# EAGLE board growledspanelxprod (EAGLE 8.3.1)
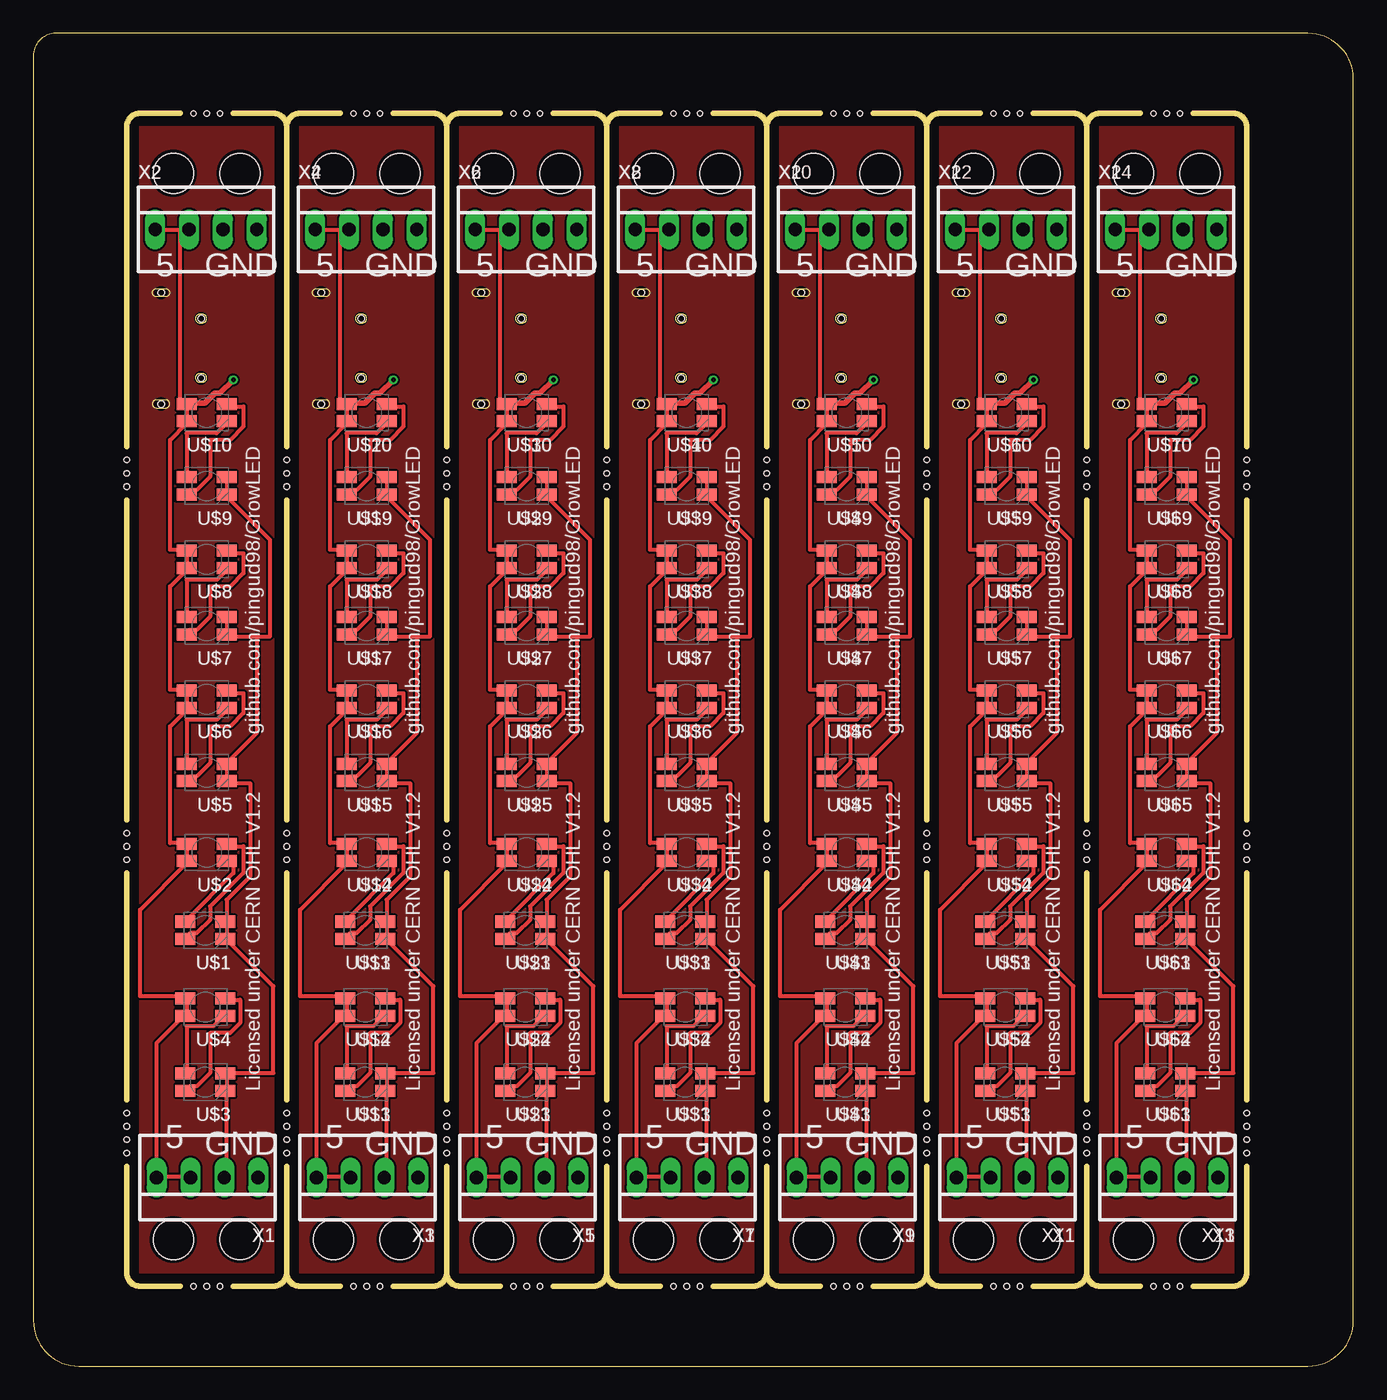
[diagram p0: board, top side]
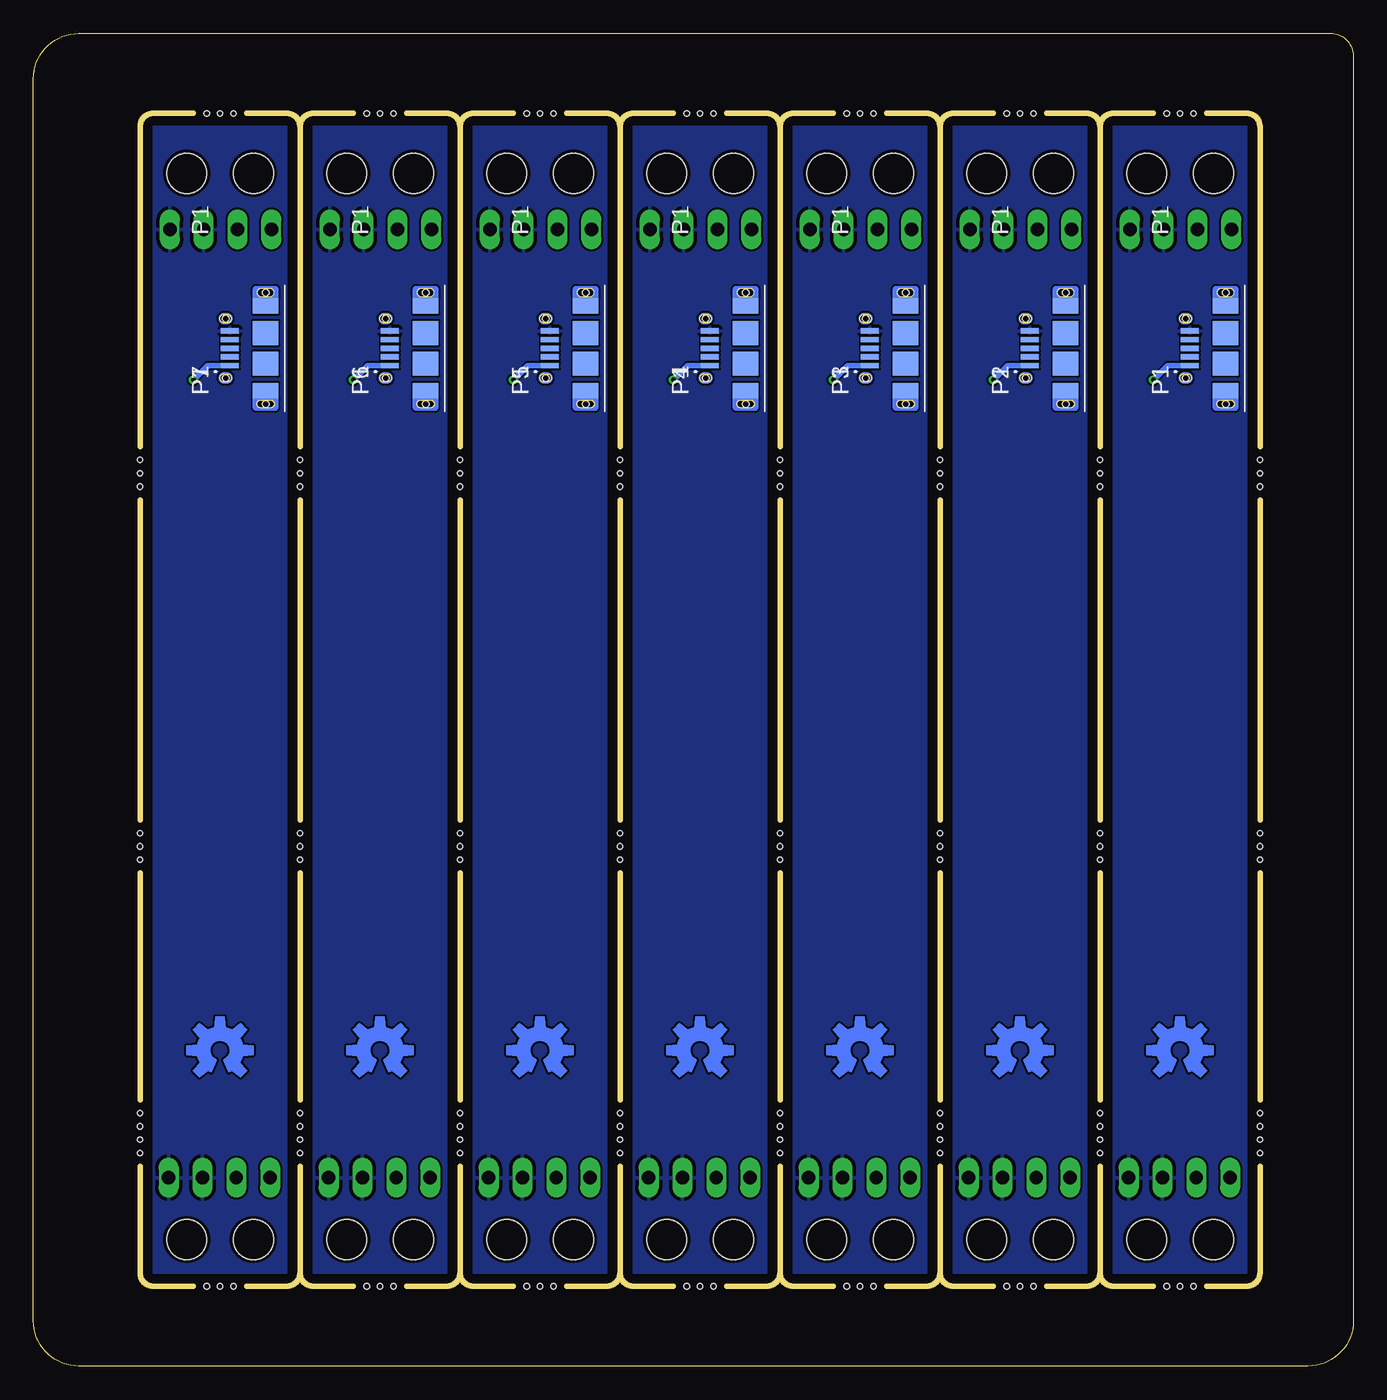
[diagram p1: board, bottom side, seen from below]

Size 99 x 100 mm. Coordinates in mm from the lower left corner, seen from the top.
Outline: 0,98.29 0,3.41 arc90 3.41,0 95.59,0 arc90 99,3.41 99,96.59 arc90 95.59,100 1.71,100 arc90 0,98.29
Copper layers (1*16): Top 0.035mm / dielectric 1.5mm / Bottom 0.035mm
Design rules "dirt_cheap_dirty_boards.v1": minimum track width 5mil, minimum drill 12mil, track to track 5mil, track to pad 5mil, pad to pad 5mil, via to via 5mil, smd to smd 0mil, copper to edge 10mil, drill to drill 10mil, minimum pad ring 10mil, minimum via ring 6mil, stop-mask expansion 2mil, vias tented up to drill 25mil, thermal gap 10mil
Net classes: 0 default: width 0.305 mm, clearance 0.152 mm
Holes 3 mm at 10.5,9.5 15.5,9.5 10.5,89.5 15.5,89.5 22.5,9.5 27.5,9.5 22.5,89.5 27.5,89.5 34.5,9.5 39.5,9.5 34.5,89.5 39.5,89.5 46.5,9.5 51.5,9.5 46.5,89.5 51.5,89.5 58.5,9.5 63.5,9.5 58.5,89.5 63.5,89.5 70.5,9.5 75.5,9.5 70.5,89.5 75.5,89.5 82.5,9.5 87.5,9.5 82.5,89.5 87.5,89.5
Holes 0.4 mm at 7,40 7,39 7,38 7,68 7,67 7,66 12,94 13,94 14,94 19,68 19,67 19,66 19,40 19,39 19,38 19,19 19,18 19,17 19,16 7,19 7,18 7,17 7,16 12,6 13,6 14,6 24,94 25,94 26,94 31,68 31,67 31,66 31,40 31,39 31,38 31,19 31,18 31,17 31,16 24,6 25,6 26,6 36,94 37,94 38,94 43,68 43,67 43,66 43,40 43,39 43,38 43,19 43,18 43,17 43,16 36,6 37,6 38,6 48,94 49,94 50,94 55,68 55,67 55,66 55,40 55,39 55,38 55,19 55,18 55,17 55,16 48,6 49,6 50,6 60,94 61,94 62,94 67,68 67,67 67,66 67,40 67,39 67,38 67,19 67,18 67,17 67,16 60,6 61,6 62,6 72,94 73,94 74,94 79,68 79,67 79,66 79,40 79,39 79,38 79,19 79,18 79,17 79,16 72,6 73,6 74,6 84,94 85,94 86,94 91,68 91,67 91,66 91,40 91,39 91,38 91,19 91,18 91,17 91,16 84,6 85,6 86,6
Milling: 112 lines

## Footprints (pad centres in the part's own frame; a part is rotated, then mirrored left to right if it is on the bottom)
MOLEX_0475890001 = smd 0.4 x 1.35: 1 -1.3,2.675; 2 -0.65,2.675; 3 0,2.675; 4 0.65,2.675; 5 1.3,2.675 | smd 1.175 x 1.9: 6 -3.187,0; 9 3.187,0 | smd 1.8 x 1.9: 7 -1.15,0; 8 1.15,0 | hole 0.5: -2.225,3; 2.225,3; -4.175,0; 4.175,0
4-PLCC = smd 1.5 x 0.9: 1 -1.5,-0.65; 2 1.5,-0.65; 3 -1.5,0.65; 4 1.5,0.65
22-23-2041 = drill 1 long: 1 -3.81,0; 2 -1.27,0; 3 1.27,0; 4 3.81,0

## Placement (x,y rotation side)
LOGO1  OSHW-LOGOM-COPPER  [OSHW-LOGO-M_COPPER]  13,23.7 0 bottom
LOGO2  OSHW-LOGOM-COPPER  [OSHW-LOGO-M_COPPER]  25,23.7 0 bottom
LOGO3  OSHW-LOGOM-COPPER  [OSHW-LOGO-M_COPPER]  37,23.7 0 bottom
LOGO4  OSHW-LOGOM-COPPER  [OSHW-LOGO-M_COPPER]  49,23.7 0 bottom
LOGO5  OSHW-LOGOM-COPPER  [OSHW-LOGO-M_COPPER]  61,23.7 0 bottom
LOGO6  OSHW-LOGOM-COPPER  [OSHW-LOGO-M_COPPER]  73,23.7 0 bottom
LOGO7  OSHW-LOGOM-COPPER  [OSHW-LOGO-M_COPPER]  85,23.7 0 bottom
P1  0475890001  [MOLEX_0475890001]  9.58,76.37 90 bottom
P2  0475890001  [MOLEX_0475890001]  21.58,76.37 90 bottom
P3  0475890001  [MOLEX_0475890001]  33.58,76.37 90 bottom
P4  0475890001  [MOLEX_0475890001]  45.58,76.37 90 bottom
P5  0475890001  [MOLEX_0475890001]  57.58,76.37 90 bottom
P6  0475890001  [MOLEX_0475890001]  69.58,76.37 90 bottom
P7  0475890001  [MOLEX_0475890001]  81.58,76.37 90 bottom
U$1  RBLED  [4-PLCC]  12.9,32.7 180 top
U$2  RBLED  [4-PLCC]  13,38.54 180 top
U$3  RBLED  [4-PLCC]  12.9,21.32 180 top
U$4  RBLED  [4-PLCC]  12.9,26.94 180 top
U$5  RBLED  [4-PLCC]  13,44.54 180 top
U$6  RBLED  [4-PLCC]  13,50.04 180 top
U$7  RBLED  [4-PLCC]  13,55.54 180 top
U$8  RBLED  [4-PLCC]  13,60.54 180 top
U$9  RBLED  [4-PLCC]  13,66.04 180 top
U$10  RBLED  [4-PLCC]  13,71.54 180 top
U$11  RBLED  [4-PLCC]  24.9,21.32 180 top
U$12  RBLED  [4-PLCC]  24.9,26.94 180 top
U$13  RBLED  [4-PLCC]  24.9,32.7 180 top
U$14  RBLED  [4-PLCC]  25,38.54 180 top
U$15  RBLED  [4-PLCC]  25,44.54 180 top
U$16  RBLED  [4-PLCC]  25,50.04 180 top
U$17  RBLED  [4-PLCC]  25,55.54 180 top
U$18  RBLED  [4-PLCC]  25,60.54 180 top
U$19  RBLED  [4-PLCC]  25,66.04 180 top
U$20  RBLED  [4-PLCC]  25,71.54 180 top
U$21  RBLED  [4-PLCC]  36.9,21.32 180 top
U$22  RBLED  [4-PLCC]  36.9,26.94 180 top
U$23  RBLED  [4-PLCC]  36.9,32.7 180 top
U$24  RBLED  [4-PLCC]  37,38.54 180 top
U$25  RBLED  [4-PLCC]  37,44.54 180 top
U$26  RBLED  [4-PLCC]  37,50.04 180 top
U$27  RBLED  [4-PLCC]  37,55.54 180 top
U$28  RBLED  [4-PLCC]  37,60.54 180 top
U$29  RBLED  [4-PLCC]  37,66.04 180 top
U$30  RBLED  [4-PLCC]  37,71.54 180 top
U$31  RBLED  [4-PLCC]  48.9,21.32 180 top
U$32  RBLED  [4-PLCC]  48.9,26.94 180 top
U$33  RBLED  [4-PLCC]  48.9,32.7 180 top
U$34  RBLED  [4-PLCC]  49,38.54 180 top
U$35  RBLED  [4-PLCC]  49,44.54 180 top
U$36  RBLED  [4-PLCC]  49,50.04 180 top
U$37  RBLED  [4-PLCC]  49,55.54 180 top
U$38  RBLED  [4-PLCC]  49,60.54 180 top
U$39  RBLED  [4-PLCC]  49,66.04 180 top
U$40  RBLED  [4-PLCC]  49,71.54 180 top
U$41  RBLED  [4-PLCC]  60.9,21.32 180 top
U$42  RBLED  [4-PLCC]  60.9,26.94 180 top
U$43  RBLED  [4-PLCC]  60.9,32.7 180 top
U$44  RBLED  [4-PLCC]  61,38.54 180 top
U$45  RBLED  [4-PLCC]  61,44.54 180 top
U$46  RBLED  [4-PLCC]  61,50.04 180 top
U$47  RBLED  [4-PLCC]  61,55.54 180 top
U$48  RBLED  [4-PLCC]  61,60.54 180 top
U$49  RBLED  [4-PLCC]  61,66.04 180 top
U$50  RBLED  [4-PLCC]  61,71.54 180 top
U$51  RBLED  [4-PLCC]  72.9,21.32 180 top
U$52  RBLED  [4-PLCC]  72.9,26.94 180 top
U$53  RBLED  [4-PLCC]  72.9,32.7 180 top
U$54  RBLED  [4-PLCC]  73,38.54 180 top
U$55  RBLED  [4-PLCC]  73,44.54 180 top
U$56  RBLED  [4-PLCC]  73,50.04 180 top
U$57  RBLED  [4-PLCC]  73,55.54 180 top
U$58  RBLED  [4-PLCC]  73,60.54 180 top
U$59  RBLED  [4-PLCC]  73,66.04 180 top
U$60  RBLED  [4-PLCC]  73,71.54 180 top
U$61  RBLED  [4-PLCC]  84.9,21.32 180 top
U$62  RBLED  [4-PLCC]  84.9,26.94 180 top
U$63  RBLED  [4-PLCC]  84.9,32.7 180 top
U$64  RBLED  [4-PLCC]  85,38.54 180 top
U$65  RBLED  [4-PLCC]  85,44.54 180 top
U$66  RBLED  [4-PLCC]  85,50.04 180 top
U$67  RBLED  [4-PLCC]  85,55.54 180 top
U$68  RBLED  [4-PLCC]  85,60.54 180 top
U$69  RBLED  [4-PLCC]  85,66.04 180 top
U$70  RBLED  [4-PLCC]  85,71.54 180 top
X1  22-23-2041  [22-23-2041]  13.05,14.15 180 top
X2  22-23-2041  [22-23-2041]  12.95,85.28 0 top
X3  22-23-2041  [22-23-2041]  25.05,14.15 180 top
X4  22-23-2041  [22-23-2041]  24.95,85.28 0 top
X5  22-23-2041  [22-23-2041]  37.05,14.15 180 top
X6  22-23-2041  [22-23-2041]  36.95,85.28 0 top
X7  22-23-2041  [22-23-2041]  49.05,14.15 180 top
X8  22-23-2041  [22-23-2041]  48.95,85.28 0 top
X9  22-23-2041  [22-23-2041]  61.05,14.15 180 top
X10  22-23-2041  [22-23-2041]  60.95,85.28 0 top
X11  22-23-2041  [22-23-2041]  73.05,14.15 180 top
X12  22-23-2041  [22-23-2041]  72.95,85.28 0 top
X13  22-23-2041  [22-23-2041]  85.05,14.15 180 top
X14  22-23-2041  [22-23-2041]  84.95,85.28 0 top

## Library data of the parts
LOGO1-LOGO7 = SparkFun-Aesthetics
P1-P7 = GROWLED; AVAILABILITY: Good; DESCRIPTION: Conn Micro USB Type AB RCP 5 POS 0.65mm Solder RA SMD 5 Terminal 1 Port T/R; MF: Molex; MP: 0475890001; PACKAGE: None; PRICE: 0.46 USD
U$1-U$70 = GROWLED
X1-X14 = con-molex; MF: MOLEX; MPN: 22-23-2041; OC_FARNELL: 1462920; OC_NEWARK: 38C0355

## Nets
5V: P1.1 U$2.2 U$2.4 U$4.2 U$4.4 U$6.2 U$6.4 U$8.2 U$8.4 U$10.2 U$10.4 X1.3 X1.4 X2.1 X2.2
5V1: P2.1 U$12.2 U$12.4 U$14.2 U$14.4 U$16.2 U$16.4 U$18.2 U$18.4 U$20.2 U$20.4 X3.3 X3.4 X4.1 X4.2
5V2: P3.1 U$22.2 U$22.4 U$24.2 U$24.4 U$26.2 U$26.4 U$28.2 U$28.4 U$30.2 U$30.4 X5.3 X5.4 X6.1 X6.2
5V3: P4.1 U$32.2 U$32.4 U$34.2 U$34.4 U$36.2 U$36.4 U$38.2 U$38.4 U$40.2 U$40.4 X7.3 X7.4 X8.1 X8.2
5V4: P5.1 U$42.2 U$42.4 U$44.2 U$44.4 U$46.2 U$46.4 U$48.2 U$48.4 U$50.2 U$50.4 X9.3 X9.4 X10.1 X10.2
5V5: P6.1 U$52.2 U$52.4 U$54.2 U$54.4 U$56.2 U$56.4 U$58.2 U$58.4 U$60.2 U$60.4 X11.3 X11.4 X12.1 X12.2
5V6: P7.1 U$62.2 U$62.4 U$64.2 U$64.4 U$66.2 U$66.4 U$68.2 U$68.4 U$70.2 U$70.4 X13.3 X13.4 X14.1 X14.2
GND: P1.5 U$1.1 U$1.3 U$3.1 U$3.3 U$5.1 U$5.3 U$7.1 U$7.3 U$9.1 U$9.3 X1.1 X1.2 X2.3 X2.4
GND1: P2.5 U$11.1 U$11.3 U$13.1 U$13.3 U$15.1 U$15.3 U$17.1 U$17.3 U$19.1 U$19.3 X3.1 X3.2 X4.3 X4.4
GND2: P3.5 U$21.1 U$21.3 U$23.1 U$23.3 U$25.1 U$25.3 U$27.1 U$27.3 U$29.1 U$29.3 X5.1 X5.2 X6.3 X6.4
GND3: P4.5 U$31.1 U$31.3 U$33.1 U$33.3 U$35.1 U$35.3 U$37.1 U$37.3 U$39.1 U$39.3 X7.1 X7.2 X8.3 X8.4
GND4: P5.5 U$41.1 U$41.3 U$43.1 U$43.3 U$45.1 U$45.3 U$47.1 U$47.3 U$49.1 U$49.3 X9.1 X9.2 X10.3 X10.4
GND5: P6.5 U$51.1 U$51.3 U$53.1 U$53.3 U$55.1 U$55.3 U$57.1 U$57.3 U$59.1 U$59.3 X11.1 X11.2 X12.3 X12.4
GND6: P7.5 U$61.1 U$61.3 U$63.1 U$63.3 U$65.1 U$65.3 U$67.1 U$67.3 U$69.1 U$69.3 X13.1 X13.2 X14.3 X14.4
N$1: U$1.2 U$2.3
N$2: U$1.4 U$2.1
N$3: U$3.2 U$4.3
N$4: U$3.4 U$4.1
N$5: U$5.2 U$6.3
N$6: U$5.4 U$6.1
N$7: U$7.2 U$8.3
N$8: U$7.4 U$8.1
N$9: U$9.2 U$10.3
N$10: U$9.4 U$10.1
N$12: U$11.2 U$12.3
N$13: U$11.4 U$12.1
N$14: U$13.2 U$14.3
N$15: U$13.4 U$14.1
N$16: U$15.2 U$16.3
N$17: U$15.4 U$16.1
N$18: U$17.2 U$18.3
N$19: U$17.4 U$18.1
N$20: U$19.2 U$20.3
N$21: U$19.4 U$20.1
N$23: U$21.2 U$22.3
N$24: U$21.4 U$22.1
N$25: U$23.2 U$24.3
N$26: U$23.4 U$24.1
N$27: U$25.2 U$26.3
N$28: U$25.4 U$26.1
N$29: U$27.2 U$28.3
N$30: U$27.4 U$28.1
N$31: U$29.2 U$30.3
N$32: U$29.4 U$30.1
N$34: U$31.2 U$32.3
N$35: U$31.4 U$32.1
N$36: U$33.2 U$34.3
N$37: U$33.4 U$34.1
N$38: U$35.2 U$36.3
N$39: U$35.4 U$36.1
N$40: U$37.2 U$38.3
N$41: U$37.4 U$38.1
N$42: U$39.2 U$40.3
N$43: U$39.4 U$40.1
N$45: U$41.2 U$42.3
N$46: U$41.4 U$42.1
N$47: U$43.2 U$44.3
N$48: U$43.4 U$44.1
N$49: U$45.2 U$46.3
N$50: U$45.4 U$46.1
N$51: U$47.2 U$48.3
N$52: U$47.4 U$48.1
N$53: U$49.2 U$50.3
N$54: U$49.4 U$50.1
N$56: U$51.2 U$52.3
N$57: U$51.4 U$52.1
N$58: U$53.2 U$54.3
N$59: U$53.4 U$54.1
N$60: U$55.2 U$56.3
N$61: U$55.4 U$56.1
N$62: U$57.2 U$58.3
N$63: U$57.4 U$58.1
N$64: U$59.2 U$60.3
N$65: U$59.4 U$60.1
N$67: U$61.2 U$62.3
N$68: U$61.4 U$62.1
N$69: U$63.2 U$64.3
N$70: U$63.4 U$64.1
N$71: U$65.2 U$66.3
N$72: U$65.4 U$66.1
N$73: U$67.2 U$68.3
N$74: U$67.4 U$68.1
N$75: U$69.2 U$70.3
N$76: U$69.4 U$70.1

## Tracks (layer width: path | path; a pad name or v marks a point on that pad's centre or on a via)
5V  (via drill 0.35)
  Top 0.305: 11,85.25 11.5,85.25 X2.2 11,85.25 | 11,85.25 9.25,85.25 X2.1 | 9.25,14.25 9.25,24.25 11.25,26.25 U$4.4 11.5,26.5 11.5,27.5 U$4.2 11.25,27.75 8,27.75 8,34.25 11.5,37.75 U$2.4 U$2.2 11.5,39.25 10.25,39.25 10.25,48 11.5,49.25 U$6.4 U$6.2 11.5,50.75 10.25,50.75 10.25,58.5 11.5,59.75 U$8.4 U$8.2 11.5,61.25 10.25,61.25 10.25,69.5 11.5,70.75 U$10.4 U$10.2 11.5,72.25 11,72.25 11,85.25 | 9.25,14.25 11.75,14.25 X1.3 | 9.25,14.25 X1.4
  Top 0.406: v15,74 14,73 13.6,73 12.86,72.25 11.5,72.25
  Bottom 0.406: P1.1 13.93,75.07 v15,74
5V1  (via drill 0.35)
  Top 0.305: 23,85.25 23.5,85.25 X4.2 23,85.25 | 23,85.25 21.25,85.25 X4.1 | 21.25,14.25 21.25,24.25 23.25,26.25 U$12.4 23.5,26.5 23.5,27.5 U$12.2 23.25,27.75 20,27.75 20,34.25 23.5,37.75 U$14.4 U$14.2 23.5,39.25 22.25,39.25 22.25,48 23.5,49.25 U$16.4 U$16.2 23.5,50.75 22.25,50.75 22.25,58.5 23.5,59.75 U$18.4 U$18.2 23.5,61.25 22.25,61.25 22.25,69.5 23.5,70.75 U$20.4 U$20.2 23.5,72.25 23,72.25 23,85.25 | 21.25,14.25 23.75,14.25 X3.3 | 21.25,14.25 X3.4
  Top 0.406: v27,74 26,73 25.6,73 24.86,72.25 23.5,72.25
  Bottom 0.406: P2.1 25.93,75.07 v27,74
5V2  (via drill 0.35)
  Top 0.305: 35,85.25 35.5,85.25 X6.2 35,85.25 | 35,85.25 33.25,85.25 X6.1 | 33.25,14.25 33.25,24.25 35.25,26.25 U$22.4 35.5,26.5 35.5,27.5 U$22.2 35.25,27.75 32,27.75 32,34.25 35.5,37.75 U$24.4 U$24.2 35.5,39.25 34.25,39.25 34.25,48 35.5,49.25 U$26.4 U$26.2 35.5,50.75 34.25,50.75 34.25,58.5 35.5,59.75 U$28.4 U$28.2 35.5,61.25 34.25,61.25 34.25,69.5 35.5,70.75 U$30.4 U$30.2 35.5,72.25 35,72.25 35,85.25 | 33.25,14.25 35.75,14.25 X5.3 | 33.25,14.25 X5.4
  Top 0.406: v39,74 38,73 37.6,73 36.86,72.25 35.5,72.25
  Bottom 0.406: P3.1 37.93,75.07 v39,74
5V3  (via drill 0.35)
  Top 0.305: 47,85.25 47.5,85.25 X8.2 47,85.25 | 47,85.25 45.25,85.25 X8.1 | 45.25,14.25 45.25,24.25 47.25,26.25 U$32.4 47.5,26.5 47.5,27.5 U$32.2 47.25,27.75 44,27.75 44,34.25 47.5,37.75 U$34.4 U$34.2 47.5,39.25 46.25,39.25 46.25,48 47.5,49.25 U$36.4 U$36.2 47.5,50.75 46.25,50.75 46.25,58.5 47.5,59.75 U$38.4 U$38.2 47.5,61.25 46.25,61.25 46.25,69.5 47.5,70.75 U$40.4 U$40.2 47.5,72.25 47,72.25 47,85.25 | 45.25,14.25 47.75,14.25 X7.3 | 45.25,14.25 X7.4
  Top 0.406: v51,74 50,73 49.6,73 48.86,72.25 47.5,72.25
  Bottom 0.406: P4.1 49.93,75.07 v51,74
5V4  (via drill 0.35)
  Top 0.305: 59,85.25 59.5,85.25 X10.2 59,85.25 | 59,85.25 57.25,85.25 X10.1 | 57.25,14.25 57.25,24.25 59.25,26.25 U$42.4 59.5,26.5 59.5,27.5 U$42.2 59.25,27.75 56,27.75 56,34.25 59.5,37.75 U$44.4 U$44.2 59.5,39.25 58.25,39.25 58.25,48 59.5,49.25 U$46.4 U$46.2 59.5,50.75 58.25,50.75 58.25,58.5 59.5,59.75 U$48.4 U$48.2 59.5,61.25 58.25,61.25 58.25,69.5 59.5,70.75 U$50.4 U$50.2 59.5,72.25 59,72.25 59,85.25 | 57.25,14.25 59.75,14.25 X9.3 | 57.25,14.25 X9.4
  Top 0.406: v63,74 62,73 61.6,73 60.86,72.25 59.5,72.25
  Bottom 0.406: P5.1 61.93,75.07 v63,74
5V5  (via drill 0.35)
  Top 0.305: 71,85.25 71.5,85.25 X12.2 71,85.25 | 71,85.25 69.25,85.25 X12.1 | 69.25,14.25 69.25,24.25 71.25,26.25 U$52.4 71.5,26.5 71.5,27.5 U$52.2 71.25,27.75 68,27.75 68,34.25 71.5,37.75 U$54.4 U$54.2 71.5,39.25 70.25,39.25 70.25,48 71.5,49.25 U$56.4 U$56.2 71.5,50.75 70.25,50.75 70.25,58.5 71.5,59.75 U$58.4 U$58.2 71.5,61.25 70.25,61.25 70.25,69.5 71.5,70.75 U$60.4 U$60.2 71.5,72.25 71,72.25 71,85.25 | 69.25,14.25 71.75,14.25 X11.3 | 69.25,14.25 X11.4
  Top 0.406: v75,74 74,73 73.6,73 72.86,72.25 71.5,72.25
  Bottom 0.406: P6.1 73.93,75.07 v75,74
5V6  (via drill 0.35)
  Top 0.305: 83,85.25 83.5,85.25 X14.2 83,85.25 | 83,85.25 81.25,85.25 X14.1 | 81.25,14.25 81.25,24.25 83.25,26.25 U$62.4 83.5,26.5 83.5,27.5 U$62.2 83.25,27.75 80,27.75 80,34.25 83.5,37.75 U$64.4 U$64.2 83.5,39.25 82.25,39.25 82.25,48 83.5,49.25 U$66.4 U$66.2 83.5,50.75 82.25,50.75 82.25,58.5 83.5,59.75 U$68.4 U$68.2 83.5,61.25 82.25,61.25 82.25,69.5 83.5,70.75 U$70.4 U$70.2 83.5,72.25 83,72.25 83,85.25 | 81.25,14.25 83.75,14.25 X13.3 | 81.25,14.25 X13.4
  Top 0.406: v87,74 86,73 85.6,73 84.86,72.25 83.5,72.25
  Bottom 0.406: P7.1 85.93,75.07 v87,74
GND
  Top 0.305: X1.2 14.5,14.25 14.5,20.5 U$3.3 14.5,20.75 14.5,21.75 U$3.1 14.5,22 18,22 18,28.5 14.5,32 U$1.3 14.5,32.25 14.5,33.25 U$1.1 14.5,33.5 14.5,35 16.25,36.75 16.25,43.75 14.5,43.75 U$5.3 U$5.1 14.5,45.25 16.75,47.5 16.75,54.75 | U$9.1 U$9.3 14.5,65.25 17.75,62 17.75,54.75 16.75,54.75 | U$7.1 U$7.3 14.5,54.75 16.75,54.75
  pour Bottom: 8,93 18,93 18,7 8,7
GND1
  Top 0.305: X3.2 26.5,14.25 26.5,20.5 U$11.3 26.5,20.75 26.5,21.75 U$11.1 26.5,22 30,22 30,28.5 26.5,32 U$13.3 26.5,32.25 26.5,33.25 U$13.1 26.5,33.5 26.5,35 28.25,36.75 28.25,43.75 26.5,43.75 U$15.3 U$15.1 26.5,45.25 28.75,47.5 28.75,54.75 | U$19.1 U$19.3 26.5,65.25 29.75,62 29.75,54.75 28.75,54.75 | U$17.1 U$17.3 26.5,54.75 28.75,54.75
  pour Bottom: 20,93 30,93 30,7 20,7
GND2
  Top 0.305: X5.2 38.5,14.25 38.5,20.5 U$21.3 38.5,20.75 38.5,21.75 U$21.1 38.5,22 42,22 42,28.5 38.5,32 U$23.3 38.5,32.25 38.5,33.25 U$23.1 38.5,33.5 38.5,35 40.25,36.75 40.25,43.75 38.5,43.75 U$25.3 U$25.1 38.5,45.25 40.75,47.5 40.75,54.75 | U$29.1 U$29.3 38.5,65.25 41.75,62 41.75,54.75 40.75,54.75 | U$27.1 U$27.3 38.5,54.75 40.75,54.75
  pour Bottom: 32,93 42,93 42,7 32,7
GND3
  Top 0.305: X7.2 50.5,14.25 50.5,20.5 U$31.3 50.5,20.75 50.5,21.75 U$31.1 50.5,22 54,22 54,28.5 50.5,32 U$33.3 50.5,32.25 50.5,33.25 U$33.1 50.5,33.5 50.5,35 52.25,36.75 52.25,43.75 50.5,43.75 U$35.3 U$35.1 50.5,45.25 52.75,47.5 52.75,54.75 | U$39.1 U$39.3 50.5,65.25 53.75,62 53.75,54.75 52.75,54.75 | U$37.1 U$37.3 50.5,54.75 52.75,54.75
  pour Bottom: 44,93 54,93 54,7 44,7
GND4
  Top 0.305: X9.2 62.5,14.25 62.5,20.5 U$41.3 62.5,20.75 62.5,21.75 U$41.1 62.5,22 66,22 66,28.5 62.5,32 U$43.3 62.5,32.25 62.5,33.25 U$43.1 62.5,33.5 62.5,35 64.25,36.75 64.25,43.75 62.5,43.75 U$45.3 U$45.1 62.5,45.25 64.75,47.5 64.75,54.75 | U$49.1 U$49.3 62.5,65.25 65.75,62 65.75,54.75 64.75,54.75 | U$47.1 U$47.3 62.5,54.75 64.75,54.75
  pour Bottom: 56,93 66,93 66,7 56,7
GND5
  Top 0.305: X11.2 74.5,14.25 74.5,20.5 U$51.3 74.5,20.75 74.5,21.75 U$51.1 74.5,22 78,22 78,28.5 74.5,32 U$53.3 74.5,32.25 74.5,33.25 U$53.1 74.5,33.5 74.5,35 76.25,36.75 76.25,43.75 74.5,43.75 U$55.3 U$55.1 74.5,45.25 76.75,47.5 76.75,54.75 | U$59.1 U$59.3 74.5,65.25 77.75,62 77.75,54.75 76.75,54.75 | U$57.1 U$57.3 74.5,54.75 76.75,54.75
  pour Bottom: 68,93 78,93 78,7 68,7
GND6
  Top 0.305: X13.2 86.5,14.25 86.5,20.5 U$61.3 86.5,20.75 86.5,21.75 U$61.1 86.5,22 90,22 90,28.5 86.5,32 U$63.3 86.5,32.25 86.5,33.25 U$63.1 86.5,33.5 86.5,35 88.25,36.75 88.25,43.75 86.5,43.75 U$65.3 U$65.1 86.5,45.25 88.75,47.5 88.75,54.75 | U$69.1 U$69.3 86.5,65.25 89.75,62 89.75,54.75 88.75,54.75 | U$67.1 U$67.3 86.5,54.75 88.75,54.75
  pour Bottom: 80,93 90,93 90,7 80,7
N$1
  Top 0.305: U$1.2 11.5,33.5 15,37 15,37.75 14.5,37.75 U$2.3
N$2
  Top 0.305: U$1.4 11.5,32.25 11.75,32.5 12.25,32.5 13.25,33.5 13.25,34.5 15.75,37 15.75,39 14.5,39 U$2.1
N$3
  Top 0.305: U$3.2 11.5,22 11.5,25.5 13.5,25.5 14.25,26.25 U$4.3
N$4
  Top 0.305: U$3.4 11.5,20.75 11.75,21 12.25,21 13.25,22 13.25,25 14.75,25 15.5,25.75 15.5,27.5 14.5,27.5 U$4.1
N$5
  Top 0.305: U$5.2 11.5,48.5 13.75,48.5 14.5,49.25 U$6.3
N$6
  Top 0.305: U$5.4 11.5,44 11.75,44.25 12.25,44.25 13.25,45.25 13.25,48 14.75,48 15.75,49 15.75,50.5 14.5,50.5 U$6.1
N$7
  Top 0.305: U$7.2 11.5,59 13.75,59 14.5,59.75 U$8.3
N$8
  Top 0.305: U$7.4 11.5,55 11.75,55.25 12.25,55.25 13.25,56.25 13.25,58.5 14.75,58.5 15.75,59.5 15.75,61 14.5,61 U$8.1
N$9
  Top 0.305: U$9.2 11.5,70 13.75,70 14.5,70.75 U$10.3
N$10
  Top 0.305: U$9.4 11.5,65.5 11.75,65.75 12.25,65.75 13.25,66.75 13.25,69.5 14.75,69.5 15.75,70.5 15.75,72 14.5,72 U$10.1
N$11
  pour Top: 8,93 18,93 18,7 8,7
N$12
  Top 0.305: U$11.2 23.5,22 23.5,25.5 25.5,25.5 26.25,26.25 U$12.3
N$13
  Top 0.305: U$11.4 23.5,20.75 23.75,21 24.25,21 25.25,22 25.25,25 26.75,25 27.5,25.75 27.5,27.5 26.5,27.5 U$12.1
N$14
  Top 0.305: U$13.2 23.5,33.5 27,37 27,37.75 26.5,37.75 U$14.3
N$15
  Top 0.305: U$13.4 23.5,32.25 23.75,32.5 24.25,32.5 25.25,33.5 25.25,34.5 27.75,37 27.75,39 26.5,39 U$14.1
N$16
  Top 0.305: U$15.2 23.5,48.5 25.75,48.5 26.5,49.25 U$16.3
N$17
  Top 0.305: U$15.4 23.5,44 23.75,44.25 24.25,44.25 25.25,45.25 25.25,48 26.75,48 27.75,49 27.75,50.5 26.5,50.5 U$16.1
N$18
  Top 0.305: U$17.2 23.5,59 25.75,59 26.5,59.75 U$18.3
N$19
  Top 0.305: U$17.4 23.5,55 23.75,55.25 24.25,55.25 25.25,56.25 25.25,58.5 26.75,58.5 27.75,59.5 27.75,61 26.5,61 U$18.1
N$20
  Top 0.305: U$19.2 23.5,70 25.75,70 26.5,70.75 U$20.3
N$21
  Top 0.305: U$19.4 23.5,65.5 23.75,65.75 24.25,65.75 25.25,66.75 25.25,69.5 26.75,69.5 27.75,70.5 27.75,72 26.5,72 U$20.1
N$22
  pour Top: 20,93 30,93 30,7 20,7
N$23
  Top 0.305: U$21.2 35.5,22 35.5,25.5 37.5,25.5 38.25,26.25 U$22.3
N$24
  Top 0.305: U$21.4 35.5,20.75 35.75,21 36.25,21 37.25,22 37.25,25 38.75,25 39.5,25.75 39.5,27.5 38.5,27.5 U$22.1
N$25
  Top 0.305: U$23.2 35.5,33.5 39,37 39,37.75 38.5,37.75 U$24.3
N$26
  Top 0.305: U$23.4 35.5,32.25 35.75,32.5 36.25,32.5 37.25,33.5 37.25,34.5 39.75,37 39.75,39 38.5,39 U$24.1
N$27
  Top 0.305: U$25.2 35.5,48.5 37.75,48.5 38.5,49.25 U$26.3
N$28
  Top 0.305: U$25.4 35.5,44 35.75,44.25 36.25,44.25 37.25,45.25 37.25,48 38.75,48 39.75,49 39.75,50.5 38.5,50.5 U$26.1
N$29
  Top 0.305: U$27.2 35.5,59 37.75,59 38.5,59.75 U$28.3
N$30
  Top 0.305: U$27.4 35.5,55 35.75,55.25 36.25,55.25 37.25,56.25 37.25,58.5 38.75,58.5 39.75,59.5 39.75,61 38.5,61 U$28.1
N$31
  Top 0.305: U$29.2 35.5,70 37.75,70 38.5,70.75 U$30.3
N$32
  Top 0.305: U$29.4 35.5,65.5 35.75,65.75 36.25,65.75 37.25,66.75 37.25,69.5 38.75,69.5 39.75,70.5 39.75,72 38.5,72 U$30.1
N$33
  pour Top: 32,93 42,93 42,7 32,7
N$34
  Top 0.305: U$31.2 47.5,22 47.5,25.5 49.5,25.5 50.25,26.25 U$32.3
N$35
  Top 0.305: U$31.4 47.5,20.75 47.75,21 48.25,21 49.25,22 49.25,25 50.75,25 51.5,25.75 51.5,27.5 50.5,27.5 U$32.1
N$36
  Top 0.305: U$33.2 47.5,33.5 51,37 51,37.75 50.5,37.75 U$34.3
N$37
  Top 0.305: U$33.4 47.5,32.25 47.75,32.5 48.25,32.5 49.25,33.5 49.25,34.5 51.75,37 51.75,39 50.5,39 U$34.1
N$38
  Top 0.305: U$35.2 47.5,48.5 49.75,48.5 50.5,49.25 U$36.3
N$39
  Top 0.305: U$35.4 47.5,44 47.75,44.25 48.25,44.25 49.25,45.25 49.25,48 50.75,48 51.75,49 51.75,50.5 50.5,50.5 U$36.1
N$40
  Top 0.305: U$37.2 47.5,59 49.75,59 50.5,59.75 U$38.3
N$41
  Top 0.305: U$37.4 47.5,55 47.75,55.25 48.25,55.25 49.25,56.25 49.25,58.5 50.75,58.5 51.75,59.5 51.75,61 50.5,61 U$38.1
N$42
  Top 0.305: U$39.2 47.5,70 49.75,70 50.5,70.75 U$40.3
N$43
  Top 0.305: U$39.4 47.5,65.5 47.75,65.75 48.25,65.75 49.25,66.75 49.25,69.5 50.75,69.5 51.75,70.5 51.75,72 50.5,72 U$40.1
N$44
  pour Top: 44,93 54,93 54,7 44,7
N$45
  Top 0.305: U$41.2 59.5,22 59.5,25.5 61.5,25.5 62.25,26.25 U$42.3
N$46
  Top 0.305: U$41.4 59.5,20.75 59.75,21 60.25,21 61.25,22 61.25,25 62.75,25 63.5,25.75 63.5,27.5 62.5,27.5 U$42.1
N$47
  Top 0.305: U$43.2 59.5,33.5 63,37 63,37.75 62.5,37.75 U$44.3
N$48
  Top 0.305: U$43.4 59.5,32.25 59.75,32.5 60.25,32.5 61.25,33.5 61.25,34.5 63.75,37 63.75,39 62.5,39 U$44.1
N$49
  Top 0.305: U$45.2 59.5,48.5 61.75,48.5 62.5,49.25 U$46.3
N$50
  Top 0.305: U$45.4 59.5,44 59.75,44.25 60.25,44.25 61.25,45.25 61.25,48 62.75,48 63.75,49 63.75,50.5 62.5,50.5 U$46.1
N$51
  Top 0.305: U$47.2 59.5,59 61.75,59 62.5,59.75 U$48.3
N$52
  Top 0.305: U$47.4 59.5,55 59.75,55.25 60.25,55.25 61.25,56.25 61.25,58.5 62.75,58.5 63.75,59.5 63.75,61 62.5,61 U$48.1
N$53
  Top 0.305: U$49.2 59.5,70 61.75,70 62.5,70.75 U$50.3
N$54
  Top 0.305: U$49.4 59.5,65.5 59.75,65.75 60.25,65.75 61.25,66.75 61.25,69.5 62.75,69.5 63.75,70.5 63.75,72 62.5,72 U$50.1
N$55
  pour Top: 56,93 66,93 66,7 56,7
N$56
  Top 0.305: U$51.2 71.5,22 71.5,25.5 73.5,25.5 74.25,26.25 U$52.3
N$57
  Top 0.305: U$51.4 71.5,20.75 71.75,21 72.25,21 73.25,22 73.25,25 74.75,25 75.5,25.75 75.5,27.5 74.5,27.5 U$52.1
N$58
  Top 0.305: U$53.2 71.5,33.5 75,37 75,37.75 74.5,37.75 U$54.3
N$59
  Top 0.305: U$53.4 71.5,32.25 71.75,32.5 72.25,32.5 73.25,33.5 73.25,34.5 75.75,37 75.75,39 74.5,39 U$54.1
N$60
  Top 0.305: U$55.2 71.5,48.5 73.75,48.5 74.5,49.25 U$56.3
N$61
  Top 0.305: U$55.4 71.5,44 71.75,44.25 72.25,44.25 73.25,45.25 73.25,48 74.75,48 75.75,49 75.75,50.5 74.5,50.5 U$56.1
N$62
  Top 0.305: U$57.2 71.5,59 73.75,59 74.5,59.75 U$58.3
N$63
  Top 0.305: U$57.4 71.5,55 71.75,55.25 72.25,55.25 73.25,56.25 73.25,58.5 74.75,58.5 75.75,59.5 75.75,61 74.5,61 U$58.1
N$64
  Top 0.305: U$59.2 71.5,70 73.75,70 74.5,70.75 U$60.3
N$65
  Top 0.305: U$59.4 71.5,65.5 71.75,65.75 72.25,65.75 73.25,66.75 73.25,69.5 74.75,69.5 75.75,70.5 75.75,72 74.5,72 U$60.1
N$66
  pour Top: 68,93 78,93 78,7 68,7
N$67
  Top 0.305: U$61.2 83.5,22 83.5,25.5 85.5,25.5 86.25,26.25 U$62.3
N$68
  Top 0.305: U$61.4 83.5,20.75 83.75,21 84.25,21 85.25,22 85.25,25 86.75,25 87.5,25.75 87.5,27.5 86.5,27.5 U$62.1
N$69
  Top 0.305: U$63.2 83.5,33.5 87,37 87,37.75 86.5,37.75 U$64.3
N$70
  Top 0.305: U$63.4 83.5,32.25 83.75,32.5 84.25,32.5 85.25,33.5 85.25,34.5 87.75,37 87.75,39 86.5,39 U$64.1
N$71
  Top 0.305: U$65.2 83.5,48.5 85.75,48.5 86.5,49.25 U$66.3
N$72
  Top 0.305: U$65.4 83.5,44 83.75,44.25 84.25,44.25 85.25,45.25 85.25,48 86.75,48 87.75,49 87.75,50.5 86.5,50.5 U$66.1
N$73
  Top 0.305: U$67.2 83.5,59 85.75,59 86.5,59.75 U$68.3
N$74
  Top 0.305: U$67.4 83.5,55 83.75,55.25 84.25,55.25 85.25,56.25 85.25,58.5 86.75,58.5 87.75,59.5 87.75,61 86.5,61 U$68.1
N$75
  Top 0.305: U$69.2 83.5,70 85.75,70 86.5,70.75 U$70.3
N$76
  Top 0.305: U$69.4 83.5,65.5 83.75,65.75 84.25,65.75 85.25,66.75 85.25,69.5 86.75,69.5 87.75,70.5 87.75,72 86.5,72 U$70.1
N$77
  pour Top: 80,93 90,93 90,7 80,7

## Text on the board
tPlace: 5 | GND | 5 | GND | 5 | GND | 5 | GND | 5 | GND | 5 | GND | 5 | GND | github.com/pingud98/GrowLED | github.com/pingud98/GrowLED | github.com/pingud98/GrowLED | github.com/pingud98/GrowLED | github.com/pingud98/GrowLED | github.com/pingud98/GrowLED | github.com/pingud98/GrowLED | Licensed under CERN OHL V1.2 | Licensed under CERN OHL V1.2 | Licensed under CERN OHL V1.2 | Licensed under CERN OHL V1.2 | Licensed under CERN OHL V1.2 | Licensed under CERN OHL V1.2 | Licensed under CERN OHL V1.2 | 5 | GND | 5 | GND | 5 | GND | 5 | GND | 5 | GND | 5 | GND | 5 | GND
tStop: GrowLED / J.Devine '17 | GrowLED / J.Devine '17 | GrowLED / J.Devine '17 | GrowLED / J.Devine '17 | GrowLED / J.Devine '17 | GrowLED / J.Devine '17 | GrowLED / J.Devine '17
_tNames: X2 | X2 | X2 | X2 | X2 | X2 | X2 | U$10 | U$10 | U$10 | U$10 | U$10 | U$10 | U$10 | U$9 | U$9 | U$9 | U$9 | U$9 | U$9 | U$9 | U$8 | U$8 | U$8 | U$8 | U$8 | U$8 | U$8 | U$7 | U$7 | U$7 | U$7 | U$7 | U$7 | U$7 | U$6 | U$6 | U$6 | U$6 | U$6 | U$6 | U$6 | U$5 | U$5 | U$5 | U$5 | U$5 | U$5 | U$5 | U$2 | U$2 | U$2 | U$2 | U$2 | U$2 | U$2 | U$1 | U$1 | U$1 | U$1 | U$1 | U$1 | U$1 | U$4 | U$4 | U$4 | U$4 | U$4 | U$4 | U$4 | U$3 | U$3 | U$3 | U$3 | U$3 | U$3 | U$3 | X1 | X1 | X1 | X1 | X1 | X1 | X1
_bNames: P1 | P1 | P1 | P1 | P1 | P1 | P1 | P1 | P1 | P1 | P1 | P1 | P1 | P1